# Altium PCB Radar_1GHz.PcbDoc (part 2 of 2)
Units mm, origin at the board's own origin, x right, y up, seen from the top; angles counter-clockwise.
Board outline 125 x 80 mm, 4 copper layers (Top Layer - RF, Layer 1 - GND, Layer 2 - GND, Bottom Layer - PWR), stack 1.591 mm thick; 163 components, 78 nets, 431 pads, 238 vias.
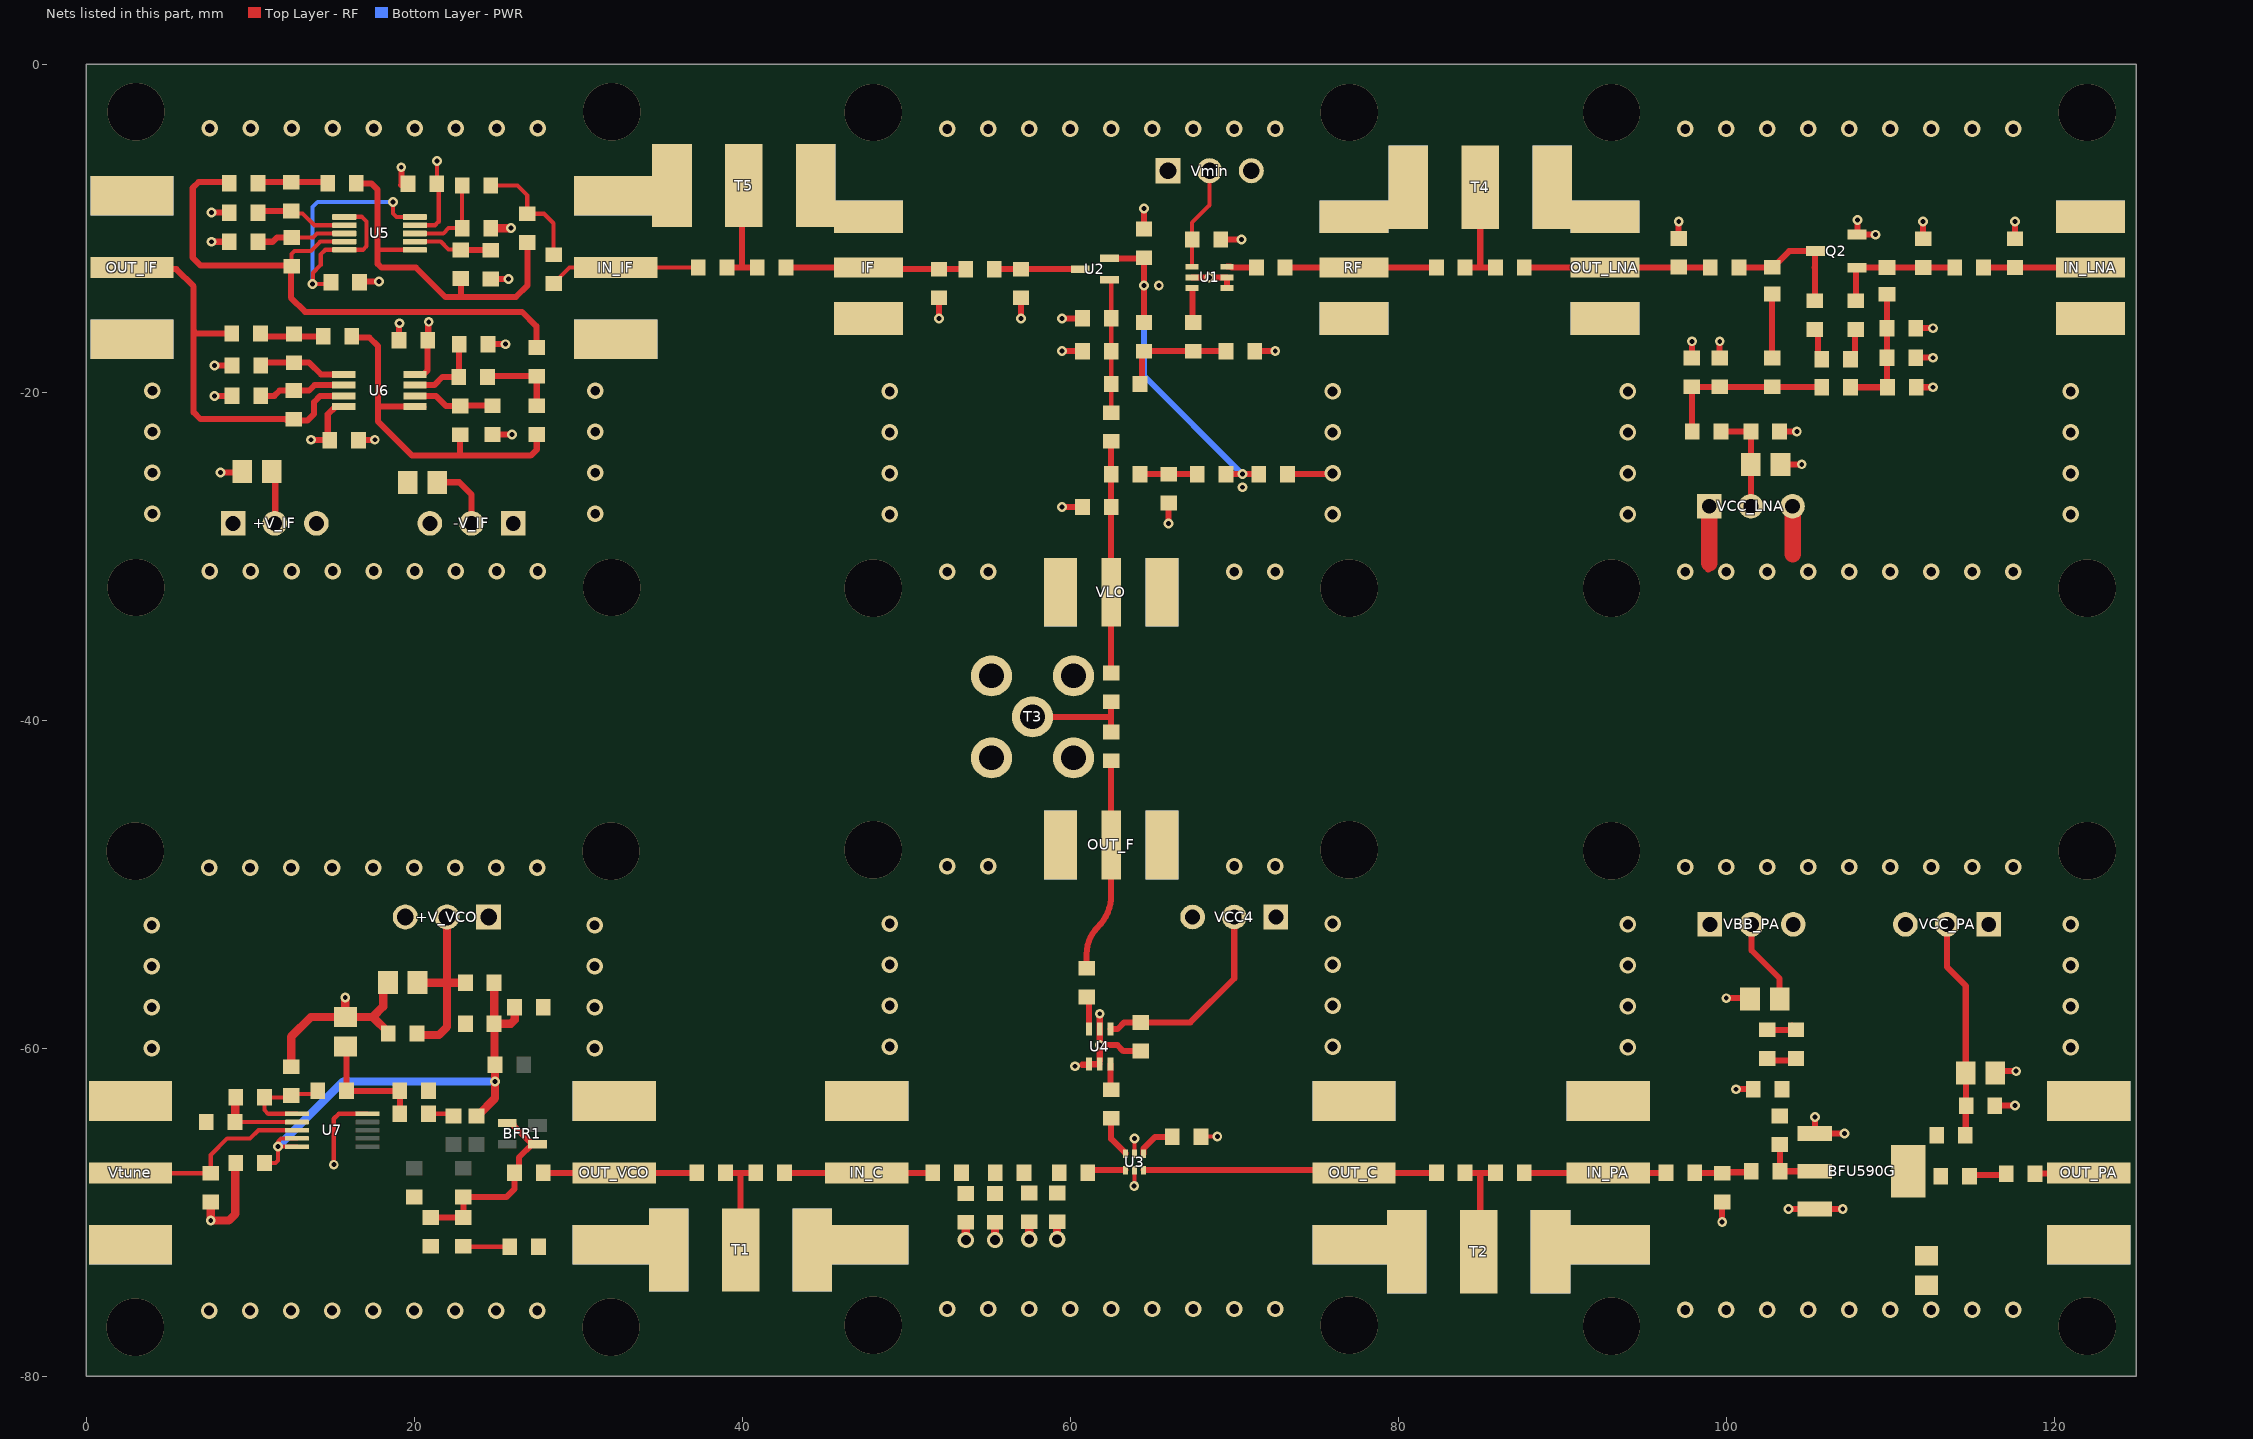
[diagram p4: the nets of this part, all layers, seen from the top]

## Via types
v1: diameter 1, hole 0.6, Top Layer - RF to Bottom Layer - PWR, tented both sides, 150 vias
v2: diameter 0.6, hole 0.3, Top Layer - RF to Bottom Layer - PWR, tented both sides, 64 vias
v3: diameter 3.5, hole 3.5, Top Layer - RF to Bottom Layer - PWR, 24 vias

## Nets (pads, with @x,y where several pads share a name; then routed paths per layer and width w, separated by ;. In a path a pad name is that pad's centre, name@x,y a point inside that pad or via, vN(x,y) a via of type N, cw(c..) or ccw(c..) an arc to the next point about the centre after c; other vN are vias at no path point) (continued)
GND: +V_IF.1 +V_IF.3 +V_VCO.01 +V_VCO.03 -V_IF.1 -V_IF.3 BFU590G.1 BFU590G.3 C1.1 C2.2 C3.2 C8.1 C9.1 C10.1 C11.1 C12.1 C13.1 C14.2 C15.1 C19.1 C20.1 C21.2 C22.2 C23.2 C24.2 C25.1 C28.1 C29.2 C30.2 C31.2 C32.2 C33.2 C34.1 C35.1 C40.1 C41.1 C42.1 C46.1 C47.1 C48.1 C51.2 C52.1 C54.1 C55.1 C56.1 Cn1.1 Cn2.1 Cp1.1 Cp2.1 Cp3.2 D1.1 IF.2 IN_C.2 IN_IF.2 IN_LNA.2 IN_PA.2 L4.2 L6.1 L7.1 L17.1 L18.1 OUT_C.2 OUT_F.2 OUT_IF.2 OUT_LNA.2 OUT_PA.2 OUT_VCO.2 Q2.2 R4.1 R6.1 R9.2 R13.1 R14.1 R16.1 R18.1 R20.1 R23.1 R40.1 R41.1 RF.2 T1.2 T2.2 T3.2 T4.2 T5.2 U1.2 U1.4 U1.5 U3.2 U3.5 U4.2 U4.4 U4.5 U7.10 VBB_PA.1 VBB_PA.3 VCC4.1 VCC4.3 VCC_LNA.1 VCC_LNA.3 VCC_PA.1 VCC_PA.3 VLO.2 Vmin.01 Vmin.03 Vtune.2 | length 100
  Top Layer - RF w0.254: v2(15.1,-67.1) 15.1,-64.3 15.4,-64 U7.10@17.15,-64 ; v2(63.9,-68.4) 63.923,-68.377 U3.2@63.923,-67.638 ; v2(63.911,-65.511) 63.911,-66.427 U3.5@63.923,-66.438 ; R13.1@68.042,-65.388 68.957,-65.388 v2(68.969,-65.377)
  Top Layer - RF w0.368: v2(7.649,-10.83) R16.1@8.724,-10.83 ; v2(7.649,-9.052) C54.1@8.724,-9.052 ; v2(7.825,-20.225) R20.1@8.9,-20.225 ; v2(7.825,-18.375) C56.1@8.9,-18.375 ; v2(8.2,-24.9) 9.475,-24.9 C51.2@9.525,-24.85 ; Cp1.1@16.6,-22.925 16.612,-22.912 17.588,-22.912 v2(17.6,-22.9) ; Cp2.1@16.625,-13.225 16.663,-13.262 v2(17.862,-13.262) ; Cn1.1@19.075,-16.775 Cn1.1@19.075,-16.825 19.088,-16.812 19.088,-15.812 v2(19.1,-15.8) ; v2(19.213,-6.287) 19.219,-6.294 19.219,-7.356 19.213,-7.362 Cn2.1@19.225,-7.375 ; C55.1@24.5,-17.075 v2(25.575,-17.075) ; R14.1@24.675,-13.1 v2(25.75,-13.1) ; R18.1@24.775,-22.575 v2(25.975,-22.575) ; v2(52,-15.5) C9.1@52,-14.25 ; v2(57,-15.5) C8.1@57,-14.25 ; v2(59.5,-27) C10.1@60.75,-27 ; v2(59.5,-17.5) C2.2@60.75,-17.5 ; v2(59.5,-15.5) L4.2@60.75,-15.5 ; v2(61.8,-59.803) 62.87,-59.803 63.242,-60.175 C48.1@64.3,-60.175 ; U4.2@61.8,-58.833 v2(61.8,-57.9) ; L7.1@64.5,-10.05 v2(64.5,-8.8) ; v2(66,-28) L6.1@66,-26.75 ; U1.2@67.433,-13 v2(68.5,-13) U1.5@69.567,-13 U1.4@69.567,-13.65 ; C1.1@69.183,-10.692 v2(70.433,-10.692) ; C3.2@71.25,-17.5 v2(72.5,-17.5) ; C11.1@73.25,-25 75.95,-25 v1(76,-24.95) ; C41.1@97.1,-10.625 v2(97.1,-9.6) ; C33.2@97.9,-17.925 v2(97.9,-16.9) ; 98.9,-30.8 98.96,-30.74 ; 98.9,-30.5 98.96,-30.44 ; C32.2@99.6,-17.925 v2(99.6,-16.9) ; v2(99.75,-70.6) C28.1@99.75,-69.375 ; v2(100,-56.95) 101.4,-56.95 C22.2@101.45,-57 ; v2(100.6,-62.5) C25.1@101.65,-62.5 ; C31.2@103.25,-22.4 v2(104.3,-22.4) ; C30.2@103.3,-24.4 v2(104.6,-24.4) ; v2(103.8,-69.8) v2(107.1,-69.8) ; 104.04,-29.89 104.1,-29.95 ; v2(105.4,-64.2) BFU590G.1@105.4,-65.2 v2(107.2,-65.2) ; v2(108,-9.5) 108,-10.354 Q2.2@107.97,-10.384 107.978,-10.392 109.092,-10.392 v2(109.1,-10.4) ; C35.1@111.55,-17.9 v2(112.6,-17.9) ; C34.1@111.55,-16.1 v2(112.6,-16.1) ; R9.2@111.575,-19.7 v2(112.6,-19.7) ; C40.1@112,-10.65 v2(112,-9.6) ; C24.2@116.375,-63.5 v2(117.6,-63.5) ; C23.2@116.375,-61.525 C23.2@116.4,-61.5 116.5,-61.4 v2(117.675,-61.4) ; C42.1@117.6,-10.65 v2(117.6,-9.6)
  Top Layer - RF w0.4: 60.75,-61 61.15,-61 61.183,-60.967 U4.5@61.778,-60.967 ; U4.5@61.8,-60.773 v2(61.8,-59.803) U4.2@61.8,-58.833
  Top Layer - RF w0.5: v1(53.636,-71.69) C46.1@53.636,-70.615 ; v1(55.414,-71.69) L17.1@55.414,-70.615 ; v1(57.5,-71.65) C47.1@57.5,-70.575 ; v1(59.2,-71.65) L18.1@59.2,-70.575
  Top Layer - RF w0.508: R40.1@7.6,-69.375 v2(7.6,-70.5) 8.7,-70.5 9.1,-70.1 9.1,-67.025 Cp3.2@9.125,-67 ; C20.1@12.5,-61.125 12.5,-59.3 13.7,-58.1 D1.1@15.8,-58.1 ; v2(15.8,-56.9) D1.1@15.8,-58.1 ; C14.2@18.4,-56 18.113,-56.287 18.113,-57.462 17.475,-58.1 ; C15.1@18.425,-59.1 18.425,-59.05 17.475,-58.1 ; R23.1@24.675,-10 v2(25.9,-10) ; D1.1@15.8,-58.1 17.475,-58.1
  Top Layer - RF w1: 98.96,-30.44 VCC_LNA.1@98.96,-26.95 ; 104.04,-29.89 VCC_LNA.3@104.04,-26.95
  other v1: 7.5,-76 10,-76 12.5,-76 15,-76 17.5,-76 20,-76 22.5,-76 25,-76 27.5,-76 97.5,-75.95 100,-75.95 102.5,-75.95 105,-75.95 107.5,-75.95 110,-75.95 112.5,-75.95 115,-75.95 117.5,-75.95 52.5,-75.9 55,-75.9 57.5,-75.9 60,-75.9 62.5,-75.9 65,-75.9 67.5,-75.9 70,-75.9 72.5,-75.9 4,-60 31,-60 94,-59.95 121,-59.95 49,-59.9 76,-59.9 4,-57.5 31,-57.5 94,-57.45 121,-57.45 49,-57.4 76,-57.4 4,-55 31,-55 94,-54.95 121,-54.95 49,-54.9 76,-54.9 4,-52.5 31,-52.5 94,-52.45 121,-52.45 49,-52.4 76,-52.4 7.5,-49 10,-49 12.5,-49 15,-49 17.5,-49 20,-49 22.5,-49 25,-49 27.5,-49 97.5,-48.95 100,-48.95 102.5,-48.95 105,-48.95 107.5,-48.95 110,-48.95 112.5,-48.95 115,-48.95 117.5,-48.95 52.5,-48.9 55,-48.9 70,-48.9 72.5,-48.9 52.5,-30.95 55,-30.95 70,-30.95 72.5,-30.95 97.5,-30.95 100,-30.95 102.5,-30.95 105,-30.95 107.5,-30.95 110,-30.95 112.5,-30.95 115,-30.95 117.5,-30.95 7.539,-30.912 10.039,-30.912 12.539,-30.912 15.039,-30.912 17.539,-30.912 20.039,-30.912 22.539,-30.912 25.039,-30.912 27.539,-30.912 49,-27.45 76,-27.45 94,-27.45 121,-27.45 4.039,-27.412 31.039,-27.412 49,-24.95 94,-24.95 121,-24.95 4.039,-24.912 31.039,-24.912 49,-22.45 76,-22.45 94,-22.45 121,-22.45 4.039,-22.412 31.039,-22.412 49,-19.95 76,-19.95 94,-19.95 121,-19.95 4.039,-19.912 31.039,-19.912 52.5,-3.95 55,-3.95 57.5,-3.95 60,-3.95 62.5,-3.95 65,-3.95 67.5,-3.95 70,-3.95 72.5,-3.95 97.5,-3.95 100,-3.95 102.5,-3.95 105,-3.95 107.5,-3.95 110,-3.95 112.5,-3.95 115,-3.95 117.5,-3.95 7.539,-3.912 10.039,-3.912 12.539,-3.912 15.039,-3.912 17.539,-3.912 20.039,-3.912 22.539,-3.912 25.039,-3.912 27.539,-3.912
  other v2: 60.3,-61.1 70.5,-25.8 65.4,-13.5
  other v3: 3,-77 32,-77 93,-76.95 122,-76.95 48,-76.9 77,-76.9 3,-48 32,-48 93,-47.95 122,-47.95 48,-47.9 77,-47.9 48,-31.95 77,-31.95 93,-31.95 122,-31.95 3.039,-31.912 32.039,-31.912 48,-2.95 77,-2.95 93,-2.95 122,-2.95 3.039,-2.912 32.039,-2.912
Net+V_VCO_02: +V_VCO.02 C14.1 C15.2 R1.1 | length 11.7
  Top Layer - RF w0.508: C15.2@20.175,-59.1 20.265,-59.19 21.51,-59.19 22,-58.7 22,-56 ; C14.1@20.2,-56 22,-56 ; +V_VCO.02@22,-52 22,-56 ; R1.1@23.125,-56 22,-56
NetBFR1_1: BFR1.1 BFR1.3 C17.1 C18.2 C19.2 L9.2 | length 12.2
  Top Layer - RF w0.368: C19.2@21,-70.325 L9.2@23,-70.325 C17.1@23,-69.075 25.625,-69.075 26.125,-68.575 C18.2@26.125,-67.6 26.391,-67.334 26.391,-66.659 BFR1.1@27.2,-65.85 ; BFR1.3@25.675,-64.55 26,-64.55 26.066,-64.616 26.066,-64.716 BFR1.1@27.2,-65.85 ; BFR1.1@27.525,-65.85 BFR1.1@27.2,-65.85
NetBFU590G_2: BFU590G.2 L12.1 L14.2 | length 3.7
  Top Layer - RF w0.368: L12.1@103.275,-65.9 L14.2@103.275,-67.5 BFU590G.2@105.4,-67.5
NetBFU590G_4: BFU590G.4 C29.1 L11.1 L13.1
NetC1_2: C1.2 U1.1 Vmin.02 | length 6.3
  Top Layer - RF w0.254: U1.1@67.433,-12.35 C1.2@67.433,-10.692 67.433,-9.667 68.5,-8.6 Vmin.02@68.5,-6.5
NetC3_1: C3.1 C5.2 L1.2 L3.2 | length 7.1
  Top Layer - RF w0.368: L1.2@64.25,-19.5 64.375,-19.375 64.375,-17.625 L3.2@64.5,-17.5 C5.2@67.5,-17.5 C3.1@69.5,-17.5
NetC4_1: C4.1 R32.1 RF.1 | length 9.2
  Top Layer - RF w0.368: C4.1@73.1,-12.4 RF.1@77.3,-12.4 R32.1@82.325,-12.4
NetC4_2: C4.2 U1.6 | length 1.8
  Top Layer - RF w0.368: U1.6@69.567,-12.35 69.77,-12.35 69.82,-12.4 C4.2@71.35,-12.4
NetC5_1: C5.1 U1.3 | length 2.1
  Top Layer - RF w0.368: U1.3@67.433,-13.65 67.46,-13.65 67.467,-13.656 67.467,-15.717 C5.1@67.5,-15.75
NetC6_1: C6.1 C10.2 L2.1 R34.2 VLO.1 | length 14.1
  Top Layer - RF w0.368: R34.2@62.5,-37.125 VLO.1@62.5,-32.2 C10.2@62.5,-27 C6.1@62.5,-25 L2.1@62.5,-23
NetC6_2: C6.2 C7.1 L6.2 | length 3.5
  Top Layer - RF w0.368: C6.2@64.25,-25 L6.2@66,-25 C7.1@67.75,-25
NetC8_2: C8.2 L5.1 U2.3 | length 5.2
  Top Layer - RF w0.368: L5.1@55.375,-12.5 C8.2@57,-12.5 U2.3@60.611,-12.5
NetC9_2: C9.2 IF.1 L5.2 R31.2 | length 11
  Top Layer - RF w0.368: R31.2@42.675,-12.4 IF.1@47.7,-12.4 47.8,-12.5 C9.2@52,-12.5 L5.2@53.625,-12.5
NetC16_2: C16.2 L8.2 | length 1.5
  Top Layer - RF w0.254: L8.2@20.875,-64 22.375,-64 C16.2@22.4,-64.025
NetC18_1: C18.1 OUT_VCO.1 R36.1 | length 9.4
  Top Layer - RF w0.368: C18.1@27.875,-67.6 OUT_VCO.1@32.2,-67.6 R36.1@37.225,-67.6
NetC20_2: C20.2 R5.2 R42.2 U7.1 | length 6.3
  Top Layer - RF w0.254: U7.1@12.85,-64 11.1,-64 10.875,-63.775 R42.2@10.875,-63 12.375,-63 C20.2@12.5,-62.875 12.575,-62.8 13.925,-62.8 R5.2@14.125,-62.6
NetC21_1: C21.1 D1.2 L8.1 R5.1 | length 7.4
  Top Layer - RF w0.368: D1.2@15.8,-59.9 15.875,-59.975 R5.1@15.875,-62.6 17,-62.6 C21.1@19.125,-62.6 L8.1@19.125,-64
NetC22_1: C22.1 L10.2 R7.2 VBB_PA.2 | length 7.4
  Top Layer - RF w0.368: VBB_PA.2@101.54,-52.45 101.54,-54.04 103.25,-55.75 C22.1@103.25,-57 ; L10.2@102.5,-58.875 R7.2@104.25,-58.875 R7.2@104,-58.625
NetC23_1: C23.1 C24.1 L11.2 VCC_PA.2 | length 13.4
  Top Layer - RF w0.368: VCC_PA.2@113.46,-52.45 113.46,-55.06 114.6,-56.2 C23.1@114.6,-61.5 114.625,-61.525 C24.1@114.625,-63.5 114.6,-63.525 114.6,-65.275 L11.2@114.575,-65.3
NetC25_2: C25.2 L10.1 L12.2 R7.1 | length 1.3
  Top Layer - RF w0.368: L10.1@102.5,-60.625 102.625,-60.75 103.75,-60.75
NetC26_1: C26.1 L13.2 | length 2.3
  Top Layer - RF w0.368: L13.2@114.825,-67.8 114.9,-67.725 117,-67.725 C26.1@117.075,-67.65
NetC26_2: C26.2 OUT_PA.1 | length 3.3
  Top Layer - RF w0.368: C26.2@118.825,-67.65 122.05,-67.65 OUT_PA.1@122.1,-67.6
NetC27_1: C27.1 IN_PA.1 R39.2 | length 8.7
  Top Layer - RF w0.368: R39.2@87.675,-67.6 IN_PA.1@92.8,-67.6 C27.1@96.325,-67.6
NetC27_2: C27.2 C28.2 L14.1 | length 3.5
  Top Layer - RF w0.368: C27.2@98.075,-67.6 98.088,-67.612 99.737,-67.612 C28.2@99.75,-67.625 99.813,-67.562 101.463,-67.562 L14.1@101.525,-67.5
NetC30_1: C30.1 C31.1 R8.2 VCC_LNA.2 | length 6.4
  Top Layer - RF w0.368: R8.2@99.675,-22.4 C31.1@101.5,-22.4 C30.1@101.5,-24.4 VCC_LNA.2@101.5,-26.95
NetC32_1: C32.1 C33.1 R8.1 R10.2 R11.2 | length 10.7
  Top Layer - RF w0.368: R8.1@97.925,-22.4 97.912,-22.387 97.912,-19.687 C33.1@97.9,-19.675 C32.1@99.6,-19.675 R11.2@102.8,-19.675 102.813,-19.688 105.812,-19.688 R10.2@105.825,-19.7
NetC34_2: C34.2 C35.2 L16.2 R9.1 R10.1 | length 7.9
  Top Layer - RF w0.368: R10.1@107.575,-19.7 R9.1@109.825,-19.7 109.8,-19.675 C35.2@109.8,-17.9 C34.2@109.8,-16.1 L16.2@109.8,-14.028
NetC36_1: C36.1 C37.1 L15.1 Q2.3 | length 7.9
  Top Layer - RF w0.368: C37.1@100.775,-12.4 100.782,-12.393 102.793,-12.393 L15.1@102.8,-12.386 102.865,-12.386 103.126,-12.125 103.126,-12.113 103.839,-11.4 Q2.3@105.43,-11.4 ; Q2.3@105.36,-11.484 105.4,-11.524 105.4,-12.4 ; 105.386,-12.386 105.4,-12.4 ; C36.1@105.4,-14.225 105.4,-12.4
NetC36_2: C36.2 R12.2 | length 2.2
  Top Layer - RF w0.368: C36.2@105.4,-15.975 105.6,-16.175 105.6,-17.775 R12.2@105.825,-18
NetC37_2: C37.2 C41.2 OUT_LNA.1 R33.2 | length 11.4
  Top Layer - RF w0.368: R33.2@87.675,-12.4 OUT_LNA.1@92.6,-12.4 C37.2@99.025,-12.4
NetC38_1: C38.1 C39.2 C40.2 L16.1 Q2.1 | length 8
  Top Layer - RF w0.368: C38.1@107.9,-14.425 107.9,-12.486 Q2.1@107.97,-12.416 107.978,-12.408 109.792,-12.408 L16.1@109.8,-12.4 C40.2@112,-12.4 C39.2@113.925,-12.4 C39.2@113.917,-12.408
NetC38_2: C38.2 R12.1 | length 2
  Top Layer - RF w0.368: R12.1@107.575,-18 107.841,-17.734 107.841,-16.234 C38.2@107.9,-16.175
NetC39_1: C39.1 C42.2 IN_LNA.1 | length 6.5
  Top Layer - RF w0.368: C39.1@115.675,-12.4 C42.2@117.6,-12.4 IN_LNA.1@122.2,-12.4
NetC43_1: C43.1 IN_C.1 R37.2 | length 9
  Top Layer - RF w0.368: R37.2@42.575,-67.6 IN_C.1@47.6,-67.6 C43.1@51.625,-67.6
NetC43_2: C43.2 C44.1 C46.2 L17.2
NetC44_2: C44.2 C45.1 C47.2 L18.2
NetC45_2: C45.2 U3.1 | length 2.4
  Top Layer - RF w0.368: C45.2@61.075,-67.6 61.237,-67.438 U3.1@63.373,-67.438
NetC48_2: C48.2 U4.1 VCC4.2 | length 12.6
  Top Layer - RF w0.368: U4.1@62.45,-58.833 62.882,-58.833 63.29,-58.425 C48.2@64.3,-58.425 67.325,-58.425 70,-55.75 VCC4.2@70,-52
NetC49_1: C49.1 U3.6 | length 2.5
  Top Layer - RF w0.368: C49.1@62.5,-64.275 62.5,-65.527 63.373,-66.4 U3.6@63.373,-66.438
NetC49_2: C49.2 U4.6 | length 1.6
  Top Layer - RF w0.368: U4.6@62.45,-60.967 62.456,-60.973 62.456,-62.481 C49.2@62.5,-62.525
NetC50_1: C50.1 U4.3 | length 2
  Top Layer - RF w0.368: C50.1@61,-56.875 61.15,-57.141 U4.3@61.15,-58.833
NetC50_2: C50.2 OUT_F.1 R35.1 | length 13.1
  Top Layer - RF w0.368: C50.2@61,-55.125 61,-54.859 61,-54.263 cw(c63.331,-54.266) 61.683,-52.617 ccw(c59.713,-50.646) 62.5,-50.646 62.5,-50.644 OUT_F.1@62.5,-47.6 R35.1@62.5,-42.475
NetC53_1: C53.1 R23.2 U5.3 | length 5.6
  Top Layer - RF w0.254: U5.3@20.04,-10.322 21.778,-10.322 22.1,-10 R23.2@22.925,-10 C53.1@22.925,-7.4
NetC53_2: C53.2 C57.1 R22.1 | length 7.4
  Top Layer - RF w0.254: C53.2@24.675,-7.4 26.3,-7.4 26.9,-8 R22.1@26.9,-9.125 27.925,-9.125 28.5,-9.7 C57.1@28.5,-11.625
NetC54_2: C54.2 R25.2 U5.7 | length 5.7
  Top Layer - RF w0.254: R25.2@12.5,-8.95 12.65,-9.1 13.2,-9.1 13.922,-9.822 U5.7@15.74,-9.822
  Top Layer - RF w0.368: C54.2@10.474,-9.052 10.576,-8.95 R25.2@12.5,-8.95
NetC55_2: C55.2 R27.2 U6.3 | length 4.9
  Top Layer - RF w0.368: U6.3@20.047,-19.575 21.225,-19.575 21.725,-19.075 R27.2@22.725,-19.075 22.725,-17.1 C55.2@22.75,-17.075
NetC56_2: C56.2 R29.2 U6.5 | length 5.4
  Top Layer - RF w0.368: C56.2@10.65,-18.375 10.825,-18.2 R29.2@12.675,-18.2 13.6,-18.2 14.325,-18.925 U6.5@15.703,-18.925
NetC57_2: C57.2 IN_IF.1 R30.1 | length 9.3
  Top Layer - RF w0.254: C57.2@28.5,-13.375 28.55,-13.375 28.873,-13.052 28.873,-13.002 29.475,-12.4 IN_IF.1@32.3,-12.4 R30.1@37.325,-12.4
NetC58_1: C58.1 R17.2 R26.1 U5.9 | length 36
  Top Layer - RF w0.254: R17.2@12.525,-12.325 12.525,-11.575 12.7,-11.4 13.7,-11.4 14.278,-10.822 U5.9@15.74,-10.822
  Top Layer - RF w0.368: C58.1@8.7,-7.2 6.849,-7.2 6.5,-7.549 6.5,-11.8 6.987,-12.287 12.488,-12.287 12.488,-14.237 13.35,-15.1 26.575,-15.1 27.45,-15.975 27.45,-17.25 R26.1@27.475,-17.275
NetC58_2: C58.2 R24.2 R25.1 | length 4.3
  Top Layer - RF w0.368: C58.2@10.474,-7.274 10.548,-7.2 14.65,-7.2 R24.2@14.725,-7.275
NetC59_1: C59.1 R19.2 R28.1 U6.1 | length 22
  Top Layer - RF w0.368: R28.1@16.3,-16.669 17.269,-16.669 17.8,-17.2 17.8,-20.8 ; U6.1@20.566,-20.891 20.063,-20.891 U6.1@20.047,-20.875 17.875,-20.875 17.8,-20.8 ; R19.2@22.8,-22.6 22.8,-23.875 ; C59.1@27.475,-22.575 27.475,-23.5 27.1,-23.875 22.8,-23.875 ; 17.8,-20.8 17.8,-21.8 19.875,-23.875 22.8,-23.875
NetC59_2: C59.2 R26.2 R27.1 | length 4.8
  Top Layer - RF w0.368: R27.1@24.475,-19.075 24.525,-19.025 R26.2@27.475,-19.025 C59.2@27.475,-20.825
NetC60_1: C60.1 OUT_IF.1 R21.2 U6.7 | length 24.4
  Top Layer - RF w0.368: OUT_IF.1@3.1,-12.35 3.25,-12.5 5.5,-12.5 6.55,-13.55 6.55,-16.25 ; C60.1@8.875,-16.425 6.725,-16.425 6.55,-16.25 ; R21.2@12.25,-21.725 13.5,-21.725 13.9,-21.325 13.9,-20.6 14.275,-20.225 U6.7@15.703,-20.225 ; R21.2@12.25,-21.65 6.975,-21.65 6.55,-21.225 6.55,-16.425 6.55,-16.25
NetC60_2: C60.2 R28.2 R29.1 | length 4
  Top Layer - RF w0.368: C60.2@10.4,-16.6 12.675,-16.6 R28.2@14.45,-16.6
NetL9_1: L9.1 R6.2 | length 2.8
  Top Layer - RF w0.254: L9.1@23,-72.075 23.025,-72.1 R6.2@25.825,-72.1
NetL15_2: L15.2 R11.1 | length 3.9
  Top Layer - RF w0.368: R11.1@102.8,-17.925 L15.2@102.8,-14.014
NetOUT_C_1: OUT_C.1 R38.1 U3.3 | length 17.9
  Top Layer - RF w0.368: U3.3@64.473,-67.438 77.138,-67.438 OUT_C.1@77.3,-67.6 R38.1@82.325,-67.6
NetR13_2: R13.2 U3.4 | length 2.4
  Top Layer - RF w0.368: U3.4@64.473,-66.438 64.473,-66.11 65.183,-65.4 R13.2@66.225,-65.4
NetR14_2: R14.2 R15.1 U5.2 | length 4.9
  Top Layer - RF w0.254: U5.2@20.04,-10.822 21.622,-10.822 22.1,-11.3 22.825,-11.3 R15.1@22.85,-11.325
  Top Layer - RF w0.368: R15.1@22.85,-11.325 24.65,-11.325 R14.2@24.675,-11.35
NetR15_2: R15.2 R22.2 R24.1 U5.1 | length 22.3
  Top Layer - RF w0.254: 17.794,-11.322 U5.1@20.04,-11.322
  Top Layer - RF w0.368: R24.1@16.475,-7.275 17.391,-7.274 17.772,-7.655 17.772,-11.3 ; 17.794,-11.322 17.772,-11.3 ; R15.2@22.85,-13.075 22.85,-14.15 22.9,-14.2 ; R22.2@26.9,-10.875 26.9,-13.5 26.2,-14.2 22.9,-14.2 ; 17.772,-11.3 17.772,-12.172 18,-12.4 20.1,-12.4 21.9,-14.2 22.9,-14.2
NetR16_2: R16.2 R17.1 U5.8 | length 5.5
  Top Layer - RF w0.254: R17.1@12.525,-10.575 13.825,-10.575 14.078,-10.322 U5.8@15.74,-10.322
  Top Layer - RF w0.368: R16.2@10.474,-10.83 11.37,-10.83 11.625,-10.575 R17.1@12.525,-10.575
NetR18_2: R18.2 R19.1 U6.2 | length 5
  Top Layer - RF w0.368: U6.2@20.047,-20.225 21.325,-20.225 21.934,-20.834 22.784,-20.834 R19.1@22.8,-20.85 22.825,-20.825 R18.2@24.775,-20.825
NetR20_2: R20.2 R21.1 U6.6 | length 5.3
  Top Layer - RF w0.368: R20.2@10.65,-20.225 11.475,-20.225 11.8,-19.9 R21.1@12.65,-19.9 13.6,-19.9 13.925,-19.575 U6.6@15.703,-19.575
NetR30_2: R30.2 R31.1 T5.1 | length 7.2
  Top Layer - RF w0.368: R30.2@39.075,-12.4 40,-12.4 ; T5.1@40,-7.1 40,-12.4 ; R31.1@40.925,-12.4 40,-12.4
NetR32_2: R32.2 R33.1 T4.1 | length 6.7
  Top Layer - RF w0.368: R32.2@84.075,-12.4 85,-12.4 ; T4.1@85,-7.5 85,-12.4 ; R33.1@85.925,-12.4 85,-12.4
NetR34_1: R34.1 R35.2 T3.1 | length 6.9
  Top Layer - RF w0.368: T3.1@57.5,-39.8 T3.1@57.7,-39.8 62.5,-39.8 ; R35.2@62.5,-40.725 62.5,-39.8 ; R34.1@62.5,-38.875 62.5,-39.8
NetR36_2: R36.2 R37.1 T1.1 | length 7.2
  Top Layer - RF w0.368: R36.2@38.975,-67.6 39.9,-67.6 ; T1.1@39.9,-72.6 T1.1@39.9,-72.3 ; T1.1@39.9,-72 T1.1@39.9,-72.3 ; R37.1@40.825,-67.6 39.9,-67.6 ; T1.1@39.9,-72.3 39.9,-67.6
NetR38_2: R38.2 R39.1 T2.1 | length 6.6
  Top Layer - RF w0.368: R38.2@84.075,-67.6 85,-67.6 ; T2.1@85,-72.4 85,-67.6 ; R39.1@85.925,-67.6 85,-67.6
NetR40_2: R40.2 U7.3 Vtune.1 | length 11.9
  Top Layer - RF w0.254: Vtune.1@2.7,-67.6 2.725,-67.625 R40.2@7.6,-67.625 7.6,-66.5 8.6,-65.5 10,-65.5 10.5,-65 U7.3@12.85,-65
NetR41_2: R41.2 R42.1 U7.2 | length 5.3
  Top Layer - RF w0.254: R41.2@9.075,-64.5 U7.2@12.85,-64.5
  Top Layer - RF w0.508: R41.2@9.075,-64.5 9.1,-64.475 9.1,-63.025 R42.1@9.125,-63 ; R42.1@9.113,-62.787 R42.1@9.125,-62.8
p3: C2.1 L1.1 L2.2 L4.1 U2.1 | length 8.2
  Top Layer - RF w0.254: U2.1@62.389,-13.15 62.398,-13.15 62.5,-13.252 L4.1@62.5,-15.5 C2.1@62.5,-17.5 L1.1@62.5,-19.5 L2.2@62.5,-21.25
p4: C7.2 C11.2 L3.1 L7.2 U2.2 | length 22.1
  Top Layer - RF w0.368: U2.2@62.389,-11.85 64.45,-11.85 L7.2@64.5,-11.8 v2(64.5,-13.5) L3.1@64.5,-15.75 ; C7.2@69.5,-25 v2(70.5,-25) C11.2@71.5,-25
  Bottom Layer - PWR w0.368: v2(64.5,-13.5) 64.5,-19 v2(70.5,-25)
V+: +V_IF.2 C51.1 Cp1.2 Cp2.2 U5.5 U5.6 U5.10 U6.8 | length 28
  Top Layer - RF w0.254: Cp2.2@14.925,-13.3 14.825,-13.4 v2(13.8,-13.4) 13.831,-13.369 13.831,-12.719 14.3,-12.25 14.3,-11.6 14.578,-11.322 U5.10@15.74,-11.322 16.878,-11.322 17.1,-11.1 17.1,-9.6 16.809,-9.309 15.727,-9.309 U5.6@15.74,-9.322 ; v2(18.7,-8.4) 18.7,-9.1 18.922,-9.322 U5.5@20.04,-9.322 U5.5@20.027,-9.309
  Top Layer - RF w0.381: C51.1@11.325,-24.85 11.525,-25.05 11.525,-27.975 +V_IF.2@11.5,-28 ; v2(13.7,-22.9) 13.712,-22.912 14.639,-22.912 14.738,-22.813 14.738,-21.345 15.208,-20.875 U6.8@15.703,-20.875
  Bottom Layer - PWR w0.254: v2(13.8,-13.4) 13.8,-8.719 14.119,-8.4 v2(18.7,-8.4)
V-: -V_IF.2 C52.2 Cn1.2 Cn2.2 U5.4 U6.4 | length 13.3
  Top Layer - RF w0.254: U5.4@20.04,-9.822 21.278,-9.822 21.495,-9.605 21.495,-7.42 Cn2.2@21.375,-7.3 21.4,-7.275 v2(21.4,-5.9)
  Top Layer - RF w0.381: U6.4@20.047,-18.925 20.072,-18.9 20.596,-18.9 20.819,-18.676 Cn1.2@20.819,-16.831 ; Cn1.2@20.825,-16.825 20.857,-16.793 20.857,-15.743 v2(20.889,-15.711) ; C52.2@21.4,-25.5 22.75,-25.5 23.5,-26.25 -V_IF.2@23.5,-28
VCO+: C12.2 C13.2 Cp3.1 R1.2 R2.2 R3.2 U7.4 U7.5 | length 30.1
  Top Layer - RF w0.254: Cp3.1@10.875,-67 11.551,-67 11.7,-66.851 v2(11.7,-66) ; U7.5@12.85,-66 v2(11.7,-66) ; U7.4@12.85,-65.5 12.837,-65.513 11.887,-65.513 11.7,-65.7 v2(11.7,-66)
  Top Layer - RF w0.508: R3.2@23.8,-64.125 23.85,-64.125 24.925,-63.05 v2(24.925,-62.025) R2.2@24.925,-61 24.9,-60.975 24.9,-58.525 C12.2@24.875,-58.5 ; R1.2@24.875,-56 C12.2@24.875,-58.5 ; C13.2@26.125,-57.5 26.125,-58.275 25.9,-58.5 C12.2@24.875,-58.5
  Bottom Layer - PWR w0.508: v2(11.7,-66) 15.675,-62.025 v2(24.925,-62.025)
pads on no net: U7.6 U7.7 U7.8 U7.9

## Polygon pours and split planes (outlines as drawn)
GND on Bottom Layer - PWR "GND_L04_P019" (solid, pour order 19): 34.6,-0.375 34.6,-34.375 0.6,-34.375 0.6,-0.375
GND on Bottom Layer - PWR "GND_L04_P004" (solid, pour order 4): 0.5,-79.5 0.5,-45.5 34.5,-45.5 34.5,-79.5
GND on Bottom Layer - PWR "NONET_L-01_P-001" (solid, pour order 22): 124.5,-34.15 90.8,-34.15 90.8,-0.5 79,-0.5 79,-34.25 59.5,-34.25 59.5,-45.85 79.2,-45.85 79.2,-79.4 90.8,-79.4 90.8,-45.95 124.5,-45.95
GND on Bottom Layer - PWR "NONET_L-01_P-001" (solid, pour order 21): 0.5,-45.8 34.2,-45.8 34.2,-79.4 46,-79.4 46,-45.7 65.4,-45.7 65.4,-34.1 45.8,-34.1 45.8,-0.4 34.2,-0.4 34.2,-34 0.5,-34
GND on Bottom Layer - PWR "GND_L04_P018" (solid, pour order 18): 45.49,-79.41 45.49,-45.41 79.49,-45.41 79.49,-79.41
GND on Bottom Layer - PWR "GND_L04_P005" (solid, pour order 5): 90.5,-79.45 90.5,-45.45 124.5,-45.45 124.5,-79.45
GND on Bottom Layer - PWR "GND_L04_P003" (solid, pour order 3): 79.51,-0.44 79.51,-34.44 45.51,-34.44 45.51,-0.44
V+ on Bottom Layer - PWR "V+_sallen" (solid, pour order 0): 10.25,-29 12.75,-29 12.75,-26.75 15.1,-24.4 15.1,-12.1 10.25,-12.1
V- on Bottom Layer - PWR "V-_sallen" (solid, pour order 1): 20.4,-17 22.16,-17 22.16,-29 24.75,-29 24.75,-5.1 20.4,-5.1
GND on Bottom Layer - PWR "GND_L04_P006" (solid, pour order 6): 124.5,-0.45 124.5,-34.45 90.5,-34.45 90.5,-0.45
GND on Top Layer - RF "NONET_L-01_P-001" (solid, pour order 11): 124.5,-34.15 90.8,-34.15 90.8,-15.75 79,-15.75 79,-34.25 65.8,-34.25 65.8,-45.85 79.2,-45.85 79.2,-64.05 90.8,-64.05 90.8,-45.95 124.5,-45.95
GND on Top Layer - RF "NONET_L-01_P-001" (solid, pour order 8): 59,-42 51.5,-42 51.5,-37.75 59,-37.75 59,-34.1 45.8,-34.1 45.8,-15.9 34.2,-15.9 34.2,-34 0.5,-34 0.5,-45.8 34.2,-45.8 34.2,-64.2 46,-64.2 46,-45.7 59,-45.7
GND on Layer 2 - GND (split plane): 124.49,-79.49 0.51,-79.49 0.51,-0.51 124.49,-0.51
GND on Layer 1 - GND (split plane): 124.49,-79.49 0.51,-79.49 0.51,-0.51 124.49,-0.51

## Other copper
Top Layer - RF:
  region net GND: 79.5,-70.95 45.5,-70.95 45.5,-79.4 79.5,-79.4
  region net GND: 124.5,-15.5 119.3,-15.5 119.3,-34.45 124.5,-34.45
  rectangle net NetC22_1: 102.992,-59 103.742,-56.492
  rectangle net NetC25_2: 103,-64.25 103.75,-60.75
  rectangle net NetBFU590G_4: 110.75,-72.55 113.45,-64.8
  region net GND: 103.63,-48.625 103.63,-52.525 104.63,-52.525 104.63,-48.625
  region net GND: 61.8,-60.4 59.7,-60.4 59.7,-61.6 61.8,-61.6
  rectangle net NetBFR1_1: 21,-68.8 21.8,-67.3
  rectangle net GND: 90.5,-5.45 124.5,-0.45
  region net GND: 115.55,-48.925 115.55,-52.825 116.55,-52.825 116.55,-48.925
  region net GND: 110.45,-48.625 110.45,-52.525 111.45,-52.525 111.45,-48.625
  region net GND: 98.55,-48.625 98.55,-52.525 99.55,-52.525 99.55,-48.625
  region net GND: 90.8,-75.2 88.1,-75.2 88.1,-79.4 90.8,-79.4
  rectangle net GND: 79.2,-79.4 81.9,-75.2
  region net GND: 90.6,-0.6 87.9,-0.6 87.9,-4.8 90.6,-4.8
  rectangle net GND: 79.2,-4.8 81.9,-0.6
  region net GND: 45.8,-0.5 43.1,-0.5 43.1,-4.7 45.8,-4.7
  rectangle net GND: 34.2,-4.7 36.9,-0.5
  region net GND: 45.7,-75.3 43,-75.3 43,-79.5 45.7,-79.5
  rectangle net GND: 34.1,-79.5 36.8,-75.3
  region net GND: 79.5,-15.5 74.375,-15.5 74.375,-34.45 79.5,-34.45
  region net GND: 79.5,-29.45 65.7,-29.45 65.7,-34.45 79.5,-34.45
  rectangle net GND: 45.5,-9.3 50.7,-0.45
  rectangle net GND: 74.375,-9.3 79.5,-0.45
  rectangle net GND: 45.575,-5.125 79.5,-0.45
  region net GND: 59.17,-29.45 45.5,-29.45 45.5,-34.45 59.17,-34.45
  region net GND: 50.625,-15.5 45.5,-15.5 45.5,-34.45 50.625,-34.45
  rectangle net GND: 90.5,-9.3 95.675,-0.45
  rectangle net GND: 119.225,-9.3 124.5,-0.45
  region net GND: 124.5,-29.45 90.5,-29.45 90.5,-34.45 124.5,-34.45
  region net GND: 95.525,-15.5 90.5,-15.5 90.5,-34.45 95.525,-34.45
  region net GND: 34.539,-29.412 0.539,-29.412 0.539,-34.412 34.539,-34.412
  region net GND: 34.539,-15.5 29.375,-15.5 29.375,-34.412 34.539,-34.412
  rectangle net GND: 0.539,-5.2 34.539,-0.412
  rectangle net GND: 29.4,-9.3 34.539,-0.412
  rectangle net GND: 0.539,-9.6 5.65,-0.412
  region net GND: 5.65,-15.8 0.539,-15.8 0.539,-34.412 5.65,-34.412
  rectangle net GND: 119.45,-64.5 124.5,-45.45
  rectangle net GND: 90.5,-50.45 124.5,-45.45
  region net GND: 95.5,-70.7 90.5,-70.7 90.5,-79.45 95.5,-79.45
  rectangle net GND: 90.5,-64.5 95.5,-45.45
  region net GND: 124.5,-74.45 90.5,-74.45 90.5,-79.45 124.5,-79.45
  region net GND: 124.5,-70.8 119.45,-70.8 119.45,-79.45 124.5,-79.45
  region net GND: 79.5,-70.4 74.5,-70.4 74.5,-79.4 79.5,-79.4
  region net GND: 50.5,-70.4 45.5,-70.4 45.5,-79.4 50.5,-79.4
  rectangle net GND: 45.5,-50.4 59.6,-45.4
  rectangle net GND: 74.225,-64.6 79.5,-45.4
  rectangle net GND: 45.5,-64.2 50.675,-45.4
  region net GND: 79.5,-45.4 65.6,-45.4 65.6,-50.4 79.5,-50.4
  rectangle net NetC43_2: 53.1,-69.2 55.9,-67.1
  rectangle net NetC44_2: 56.903,-69.127 59.703,-67.027
  rectangle net GND: 0.5,-64.2 5.65,-45.5
  rectangle net GND: 29.375,-64.5 34.5,-45.5
  rectangle net GND: 0.5,-50.5 34.5,-45.5
  region net GND: 34.5,-74.5 0.5,-74.5 0.5,-79.5 34.5,-79.5
  region net GND: 5.65,-70.7 0.5,-70.7 0.5,-79.5 5.65,-79.5
  region net GND: 34.5,-70.7 29.5,-70.7 29.5,-79.5 34.5,-79.5
Bottom Layer - PWR:
  pour cut-out: 21.8,-22.1 21.8,-17.2 14.075,-17.2 14.075,-22.4 22.1,-22.4
  pour cut-out: 22.115,-12.613 22.115,-8.6 12.9,-8.6 12.9,-12.613
Layer 1 - GND (plane layer: these items are gaps in the copper):
  pour cut-out: 22.175,-12.425 22.175,-8.075 12.9,-8.075 12.9,-12.425
  pour cut-out: 22.05,-22.35 22.05,-17.4 14.075,-17.4 14.075,-22.4 22.1,-22.4
Layer 2 - GND (plane layer: these items are gaps in the copper):
  pour cut-out: 22.05,-22.35 22.05,-17.4 14.075,-17.4 14.075,-22.4 22.1,-22.4
  pour cut-out: 22.175,-12.425 22.175,-8.075 12.9,-8.075 12.9,-12.425

## Silkscreen, mask and mechanical layers (free items; w line width, h text height)
Top Overlay:
  drawing of 134 lines, arcs and shapes, not listed
  text "MIXER" at 72.4,-1.511 h4 r180
  text "LNA" at 116.4,-1.511 h4 r180
  text "FI" at 26.4,-1.611 h4 r180
  text "Radar SEP2024" at 60.5,-6.1 h1.52 r180
  text "IN" at 33.5,-19.556 h2 r180
  text "OUT" at 4,-20.456 h2 r180
  text "IF" at 48.1,-20.456 h2 r180
  text "RF" at 78.4,-20.456 h2 r180
  text "IN" at 123.4,-20.456 h2 r180
  text "OUT" at 94.1,-20.656 h2 r180
  text "LO" at 55.2,-32.256 h2 r180
  text "Radar SEP2024" at 22.439,-32.312 h1.52 r180
  text "Radar SEP2024" at 112.4,-32.35 h1.52 r180
  text "Radar SEP2024" at 102.6,-47.55 h1.52
  text "Radar SEP2024" at 12.6,-47.6 h1.52
  text "MON" at 52.8,-47.844 h2
  text "OUT" at 120.7,-59.244 h2
  text "VTUNE" at 1.3,-59.335 h2
  text "OUT" at 75.8,-59.344 h2
  text "OUT" at 30.9,-59.444 h2
  text "IN" at 46.6,-59.444 h2
  text "IN" at 91.8,-59.544 h2
  text "Radar SEP2024" at 64.6,-73.8 h1.52
  text "COUPLER" at 50.9,-78.189 h4
  text "PA" at 98.2,-78.589 h4
  text "VCO" at 7.8,-78.689 h4
Bottom Overlay:
  drawing of 372 lines, arcs and shapes, not listed
  text "Electrónica  / Aplicada III" at 13.4,-3.2 h1.52 r180
  text "Electrónica  / Aplicada III" at 56.6,-3.5 h1.52 r180
  text "Electrónica  / Aplicada III" at 108,-25.8 h1.52 r180
  text "Electrónica  / Aplicada III" at 67.5,-56.5 h1.52
  text "Electrónica  / Aplicada III" at 21.5,-56.7 h1.52
  text "Electrónica  / Aplicada III" at 111.1,-56.8 h1.52
Board Shape:
  the board outline again, w0.254
V Cut:
  lines w0.5: 0,-44.95 125,-44.95 ; 0.1,-34.95 125,-34.95 ; 35,-80 35,0 ; 45,-80 45,0 ; 80,-80 80,0 ; 90,-80 90,0
Dimensions:
  drawing of 217 lines, arcs and shapes, not listed
  text "Layer" at 154.994,11.138 h1.52
  text "Name" at 165.406,11.138 h1.52
  text "Material" at 199.178,11.138 h1.52
  text "Thickness" at 215.938,11.138 h1.52
  text "Constant" at 232.444,11.138 h1.52
  text "Top Overlay" at 165.406,8.09 h1.52
  text "Top Solder" at 165.406,5.042 h1.52
  text "SM-001" at 199.178,5.042 h1.52
  text "0,025mm" at 215.938,5.042 h1.52
  text "4" at 232.444,5.042 h1.52
  text "Top Surface Finish" at 165.406,1.994 h1.52
  text "Lead-Free" at 199.178,1.994 h1.52
  text "0,020mm" at 215.938,1.994 h1.52
  text "1" at 154.994,-1.054 h1.52
  text "Top Layer - RF" at 165.406,-1.054 h1.52
  text "Copper" at 199.178,-1.054 h1.52
  text "0,035mm" at 215.938,-1.054 h1.52
  text "Prepeg 1" at 165.406,-4.102 h1.52
  text "PP-006" at 199.178,-4.102 h1.52
  text "0,210mm" at 215.938,-4.102 h1.52
  text "4.4" at 232.444,-4.102 h1.52
  text "2" at 154.994,-7.15 h1.52
  text "Layer 1 - GND" at 165.406,-7.15 h1.52
  text "CF-004" at 199.178,-7.15 h1.52
  text "0,018mm" at 215.938,-7.15 h1.52
  text "Dielectric 1" at 165.406,-10.198 h1.52
  text "FR4" at 199.178,-10.198 h1.52
  text "1,065mm" at 215.938,-10.198 h1.52
  text "4.6" at 232.444,-10.198 h1.52
  text "3" at 154.994,-13.246 h1.52
  text "Layer 2 - GND" at 165.406,-13.246 h1.52
  text "CF-004" at 199.178,-13.246 h1.52
  text "0,018mm" at 215.938,-13.246 h1.52
  text "Prepeg 2" at 165.406,-16.294 h1.52
  text "PP-006" at 199.178,-16.294 h1.52
  text "0,210mm" at 215.938,-16.294 h1.52
  text "4.4" at 232.444,-16.294 h1.52
  text "4" at 154.994,-19.342 h1.52
  text "Bottom Layer - PWR" at 165.406,-19.342 h1.52
  text "Copper" at 199.178,-19.342 h1.52
  text "0,035mm" at 215.938,-19.342 h1.52
  text "Bottom Surface Finish" at 165.406,-22.39 h1.52
  text "Lead-Free" at 199.178,-22.39 h1.52
  text "0,020mm" at 215.938,-22.39 h1.52
  text "Bottom Solder" at 165.406,-25.438 h1.52
  text "SM-001" at 199.178,-25.438 h1.52
  text "0,025mm" at 215.938,-25.438 h1.52
  text "4" at 232.444,-25.438 h1.52
  text "Bottom Overlay" at 165.406,-28.486 h1.52

## Dimensions
125,0.05 to 125,-79.95 on Mechanical 16
0,-80 to 125,-80 on Mechanical 16

## Text inside footprints (layer, text, board x,y; h text height)
IF: Mechanical 13 "PCB EDGE" at 45.414,-19.004 h0.61
IN_LNA: Mechanical 13 "PCB EDGE" at 124.486,-5.796 h0.61 r180
OUT_F: Mechanical 13 "PCB EDGE" at 55.896,-45.314 h0.61 r270
OUT_LNA: Mechanical 13 "PCB EDGE" at 90.314,-19.004 h0.61
RF: Mechanical 13 "PCB EDGE" at 79.586,-5.796 h0.61 r180
T1: Mechanical 13 "PCB EDGE" at 46.504,-74.586 h0.61 r90
T2: Mechanical 13 "PCB EDGE" at 91.504,-74.686 h0.61 r90
T4: Mechanical 13 "PCB EDGE" at 78.396,-5.214 h0.61 r270
T5: Mechanical 13 "PCB EDGE" at 33.496,-5.114 h0.61 r270
U1: Mechanical 13 "*" at 67.89,-13.241 h1.27; Top Overlay "*" at 65.8,-12.25 h0.9
U4: Mechanical 13 "*" at 61.559,-59.29 h1.27 r270; Top Overlay "*" at 62.679,-58.262 h0.9 r270
U6: Mechanical 13 "*" at 20.618,-21.18 h1.27 r180; Top Overlay "*" at 20.618,-21.18 h0.9 r180
VLO: Mechanical 13 "PCB EDGE" at 69.104,-34.486 h0.61 r90